# Altium PCB D5035_01.PcbDoc
Units mm, origin at the board's own origin, x right, y up, seen from the top; angles counter-clockwise.
Board outline 73 x 39 mm, 2 copper layers (Top Layer, Bottom Layer), stack 1.57 mm thick; 74 components, 60 nets, 282 pads, 39 vias.
Unrouted connection lines stored in the file: 1.
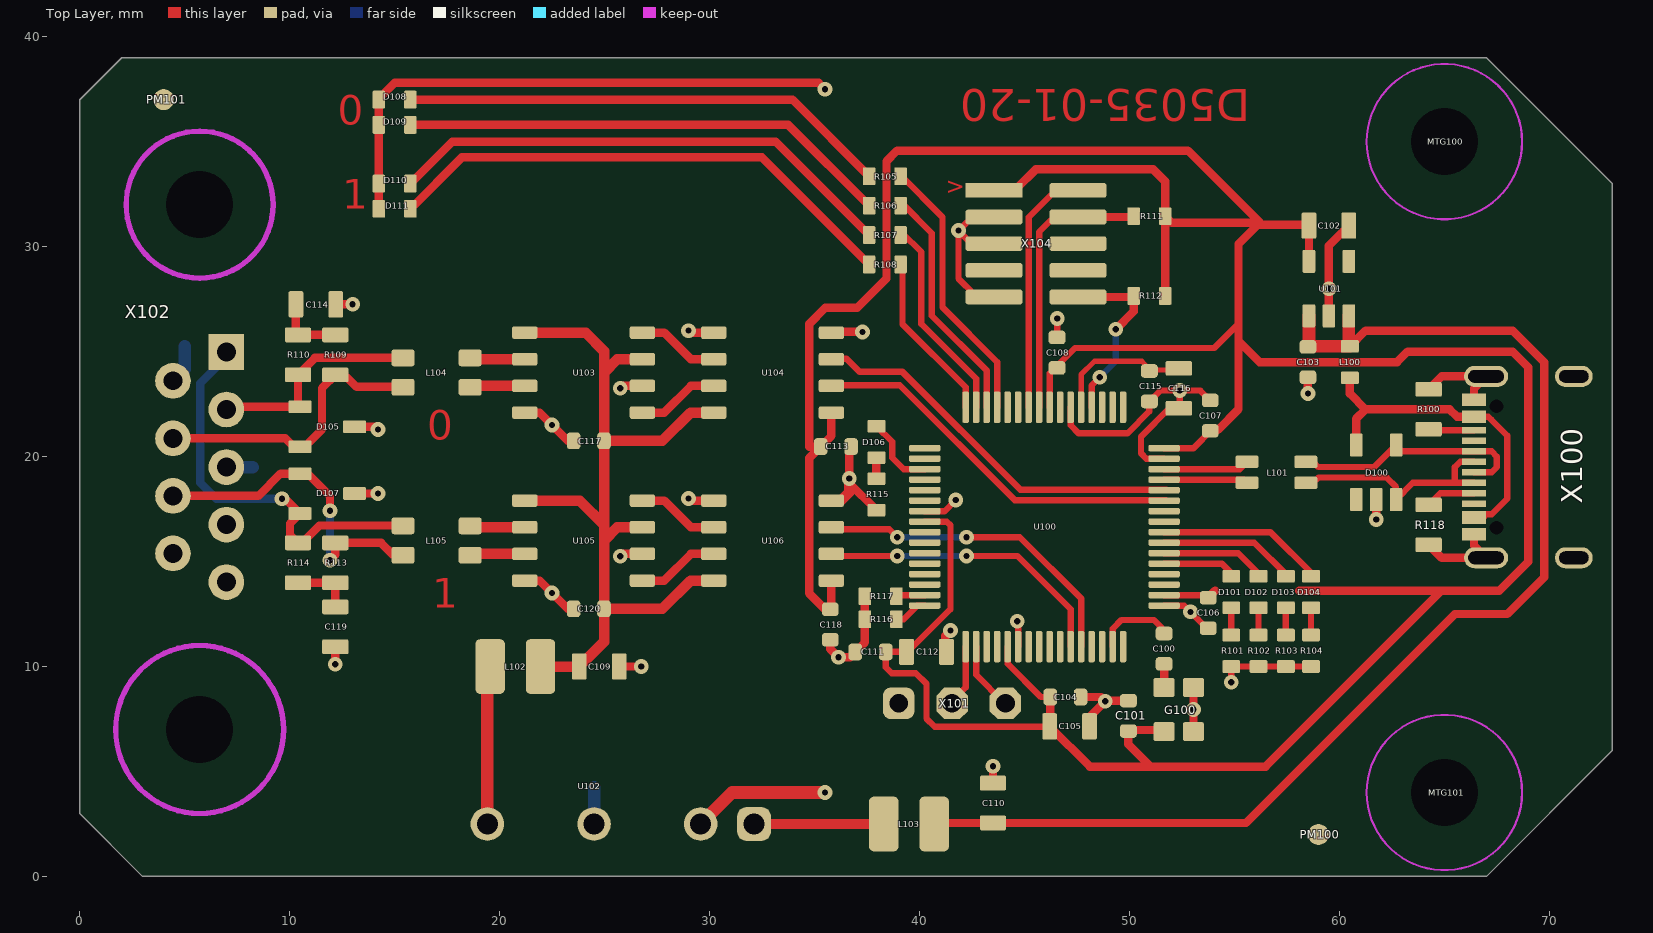
[diagram p0: Top Layer view]
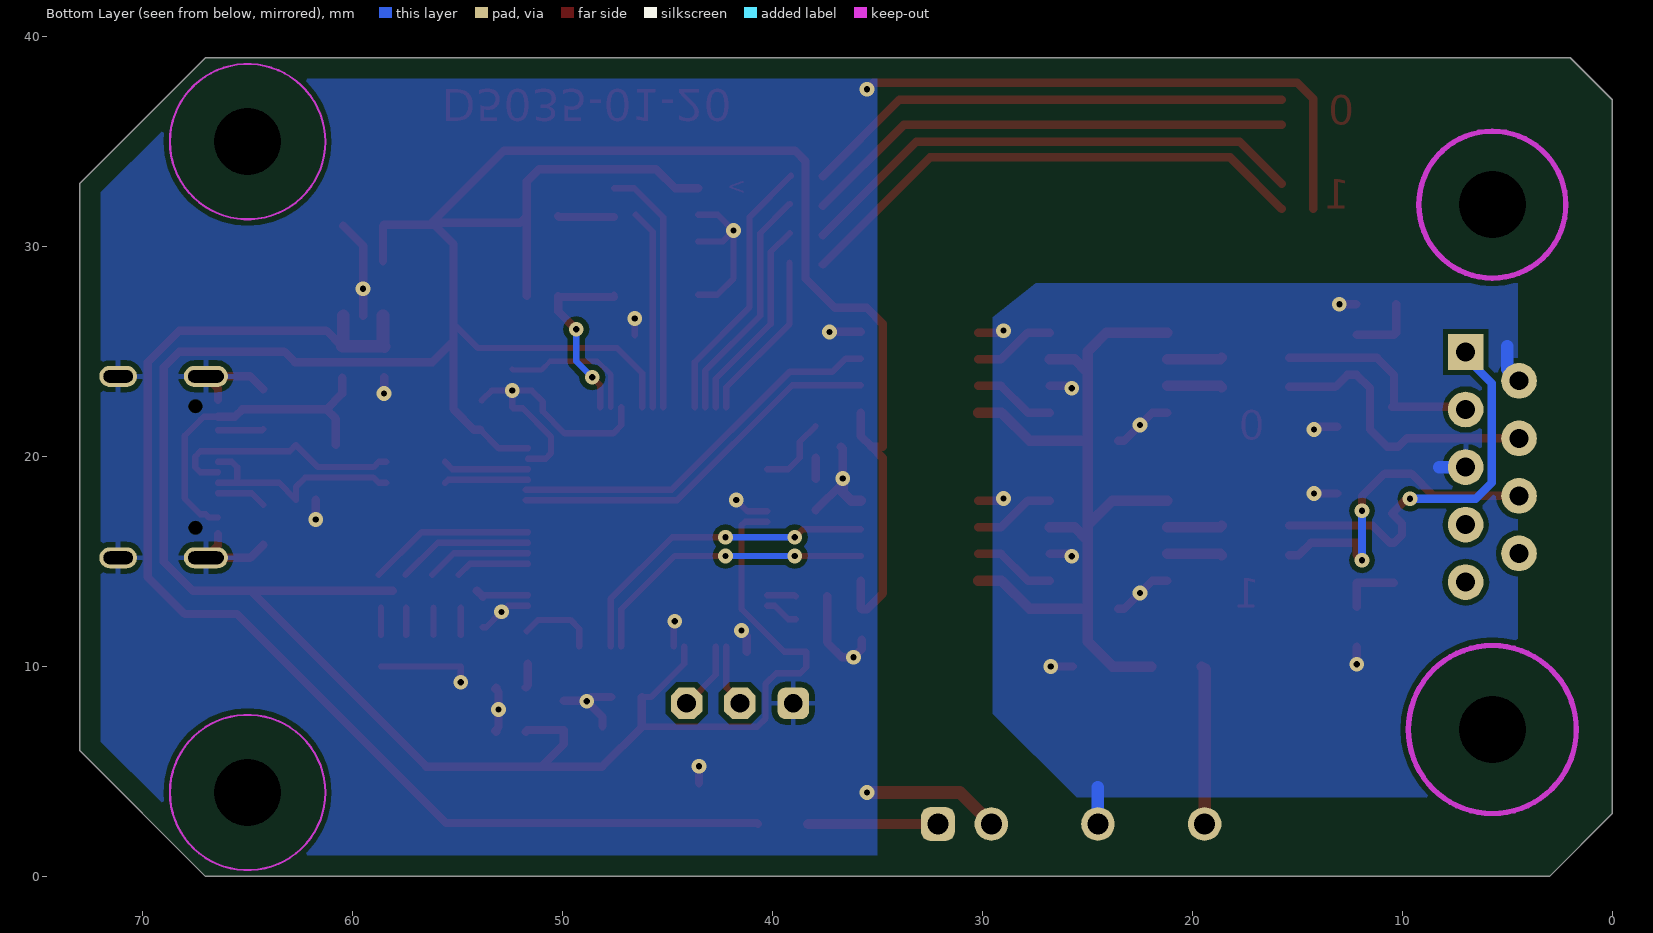
[diagram p1: Bottom Layer view, seen from below]

## Layer stack, top to bottom
Top Solder: solder mask 0.01, Solder Resist, Dk 3.5
Top Layer: signal copper 0.035
Dielectric 1: dielectric 1.5, FR-4, Dk 4.8
Bottom Layer: signal copper 0.035
Bottom Solder: solder mask 0.01, Solder Resist, Dk 3.5

## Board outline
0,3 0,37 2,39 67,39 73,33 73,6 67,0 3,0

## Design rules (kind name [scope] priority, off if disabled: settings)
BoardOutlineClearance [All] p1: gap=1 ignorepadtopadclearanceinfootprint=FALSE
Clearance [All] p1: gap=0.152 ignorepadtopadclearanceinfootprint=FALSE except(0: Arc-Hole Track-Hole SMDPad-Hole THPad-Hole Via-Hole Fill-Hole Poly-Hole Region-Hole Text-Hole; 0.254: Arc-Poly Track-Poly SMDPad-Poly THPad-Poly Via-Poly Fill-Poly Poly-Poly) // 1
DiffPairsRouting [All] p1: maxlimit=0.254 minlimit=0.2 mostfreqgap=0.254 toplayer_minwidth=0.25 toplayer_maxwidth=0.381 toplayer_prefwidth=0.3 bottomlayer_minwidth=0.25 bottomlayer_maxwidth=0.381 bottomlayer_prefwidth=0.3 maxuncoupledlength=12.7
HoleSize [All] p1: absolutevalues=TRUE maxlimit=5.08 minlimit=0.3 maxpercent=80.000 minpercent=20.000
MinimumSolderMaskSliver [All] p1: minsoldermaskwidth=0.11
PasteMaskExpansion [All] p1 off: expansion=0
PolygonConnect PolygonConnect_2 [IsVia] p1: connectstyle=Direct reliefconductorwidth=0.254 reliefentries=4 polygonreliefangle="90 Angle" airgapwidth=0.254
PolygonConnect PolygonConnect_1 [IsPad] p2: thpad.connectstyle=Relief thpad.reliefconductorwidth=0.254 thpad.reliefentries=4 thpad.polygonreliefangle="90 Angle" thpad.airgapwidth=0.254 smdpad.connectstyle=Direct smdpad.reliefconductorwidth=0.254 smdpad.reliefentries=4 smdpad.polygonreliefangle="90 Angle" smdpad.airgapwidth=0.254 via.connectstyle=Direct via.reliefconductorwidth=0.254 via.reliefentries=4 via.polygonreliefangle="90 Angle" via.airgapwidth=0.254
PolygonConnect [All] p3: connectstyle=Relief reliefconductorwidth=0.406 reliefentries=4 polygonreliefangle="90 Angle" airgapwidth=0.254
RoutingVias [All] p1: holewidth=0.3 width=0.6 viastyle="Through Hole" minholewidth=0.3 minwidth=0.6 maxholewidth=1 maxwidth=2
SilkToBoardRegionClearance [All] p1 off:
SilkToSilkClearance [All] p1 off: silktosilkclearance=0.254
SilkToSolderMaskClearance [IsPad] p1 off: minsilkscreentomaskgap=0.254 clearancetoexposedcopper=TRUE
SolderMaskExpansion SolderMaskExpansion_VIA [IsVia] p1: expansion=0.05 istentingtop=FALSE soldermaskfromhole=TRUE
SolderMaskExpansion [All] p2: expansion=0.04 istentingtop=FALSE
Width [All] p1: maxlimit=2.54 minlimit=0.25 preferedwidth=0.3 minimp=50.000000 maximp=50.000000 favimp=50.000000
23 further rules are at their usual default settings.

## Components (designator, comment, footprint, x,y, rotation, side; value= is the part's Value field where it differs from the comment)
C100 "10n" CAPC1608X09L 51.65,10.85 r270 top
C101 "100n" CAPC1608X09L 49.95,7.65 r270 top
C102 "4µ7" CAPC2012X14L 59.5,31 r180 top
C103 "100n" CAPC1608X09L 58.5,24.5 r90 top
C104 "100n" CAPC1608X09L 46.95,8.55 r180 top
C105 "4µ7" CAPC2012X14L 47.15,7.15 r180 top
C106 "100n" CAPC1608X09L 53.75,12.55 r90 top
C107 "100n" CAPC1608X09L 53.85,21.95 r270 top
C108 "100n" CAPC1608X09L 46.55,24.95 r270 top
C109 "4µ7" CAPC2012X14L 24.75,10 r180 top
C110 "4µ7" CAPC2012X14L 43.5,3.5 r270 top
C111 "100n" CAPC1608X09L 37.668,10.697 r0 top
C112 "4µ7" CAPC2012X14L 40.335,10.697 r180 top
C113 "100n" CAPC1608X09L 36.017,20.476 r180 top
C114 "4n7" CAPC2012X14L 11.25,27.25 r180 top
C115 "100n" CAPC1608X09L 50.95,23.35 r90 top
C116 "4µ7" CAPC2012X14L 52.35,23.25 r90 top
C117 "100n" CAPC1608X09L 24.25,20.75 r0 top
C118 "100n" CAPC1608X09L 35.75,12 r90 top
C119 "4n7" CAPC2012X14L 12.176,11.89 r90 top
C120 "100n" CAPC1608X09L 24.25,12.75 r0 top
D100 "WE_824011" SOT95P280X110-5N 61.75,19.25 r90 top
D101 "red" DIOC1608X06N_LED 54.85,13.55 r90 top
D102 "yellow" DIOC1608X06N_LED 56.15,13.55 r90 top
D103 "green" DIOC1608X06N_LED 57.45,13.55 r90 top
D104 "blue" DIOC1608X06N_LED 58.65,13.55 r90 top
D105 "PESD1CAN" SOT95P280X110-3N 11.795,21.415 r0 top
D106 "green" DIOC1608X06N_LED 37.95,20.7 r90 top
D107 "PESD1CAN" SOT95P280X110-3N 11.795,18.24 r0 top
D108 "green" DIOC1608X06N_LED 15,37 r0 top
D109 "red" DIOC1608X06N_LED 15,35.8 r0 top
D110 "green" DIOC1608X06N_LED 15,33 r0 top
D111 "red" DIOC1608X06N_LED 15,31.8 r0 top
G100 "16MHz" TG2520 52.35,7.95 r90 top
L100 "WE_742792641" INDC1608X06L 60.5,24.5 r90 top
L101 "WE_744232090" WE_744232090 57,19.25 r180 top
L102 "82103C" Murata_8200C 20.75,10 r0 top
L103 "82103C" Murata_8200C 39.5,2.5 r180 top
L104 "DLW32SH101XF2L‎" ACT1210 17,24 r0 top
L105 "DLW32SH101XF2L‎" ACT1210 17,16 r0 top
MTG100 "MH_M3" HOLE_3_2MM 65,35 r0 top
MTG101 "MH_M3" HOLE_3_2MM 65,4 r0 top
PM100 "Fidicual" PM100 59,2 r0 top
PM101 "Fidicual" PM100 4,37 r0 top
R100 "4k7" RESC2012X06L 64.25,22.25 r270 top
R101 "1k" RESC1608X06L 54.85,10.75 r90 top
R102 "1k" RESC1608X06L 56.15,10.75 r90 top
R103 "1k" RESC1608X06L 57.45,10.75 r90 top
R104 "1k" RESC1608X06L 58.65,10.75 r90 top
R105 "2k" RESC1608X06L 38.35,33.35 r0 top
R106 "1k" RESC1608X06L 38.35,31.95 r0 top
R107 "2k" RESC1608X06L 38.35,30.55 r0 top
R108 "1k" RESC1608X06L 38.35,29.15 r0 top
R109 "4k7" RESC2012X06L 12.176,24.844 r270 top
R110 "4k7" RESC2012X06L 10.398,24.844 r270 top
R111 "10k" RESC1608X06L 50.95,31.45 r0 top
R112 "10k" RESC1608X06L 50.95,27.65 r0 top
R113 "4k7" RESC2012X06L 12.176,14.938 r90 top
R114 "4k7" RESC2012X06L 10.398,14.938 r90 top
R115 "10k" RESC1608X06L 37.95,18.2 r90 top
R116 "10k" RESC1608X06L 38.15,12.25 r180 top
R117 "10k" RESC1608X06L 38.15,13.35 r180 top
R118 "4k7" RESC2012X06L 64.25,16.75 r90 top
U100 "SAME51J18A-AU / SAME51J19A-AU" TSQFP50P1200X1200X120-64N 45.95,16.65 r0 top
U101 "MIC5317-3.3YD5" SOT95P280X110-5N 59.5,28 r90 top
U102 "MER1S0505SC" MER1SxxxxC 24.5,2.5 r180 top
U103 "TCAN1462VDRQ1" SOIC127P600X175-8N 24,24 r180 top
U104 "SI8621EC-B-IS" SOIC127P600X175-8N 33,24 r180 top
U105 "TCAN1462VDRQ1" SOIC127P600X175-8N 24,16 r180 top
U106 "SI8621EC-B-IS" SOIC127P600X175-8N 33,16 r180 top
X100 "USB-C_16p" USBC_16P 70,19.5 r90 top
X101 "1x3 2,54mm" PINH_1x03_2_54mm 41.55,8.25 r0 top
X102 "9651226803" 09651226803 6.985,19.5 r90 top
X104 "SWD" FTSH-105-01-L-DV-K 45.55,30.15 r270 top

## Footprints (in the part's own frame and the unit in brackets; to place one, negate y for a bottom-side part, rotate by r counter-clockwise, add the part's x,y. Pads: shape width x height; smd on the part's side, far side on the other; paste and mask are expansions set on the pad)
09651226803 [mm]
  rect 1.7x1.7 hole 0.9: 1(5.48,0)
  round 1.7 hole 0.9: 2(2.74,0) 3(0,0) 4(-2.74,0) 5(-5.48,0) 6(4.11,2.54) 7(1.37,2.54) 8(-1.37,2.54) 9(-4.11,2.54)
  round 0 hole 3.2 unplated: SH(-12.5,1.27) SH(12.5,1.27)
  body extent -15.46,-1.85 15.45,19.05, height 13.55
ACT1210 [mm]
  rrect30% 1.1x0.8 smd: 1(-1.6,0.7) 2(-1.6,-0.7) 3(1.6,-0.7) 4(1.6,0.7)
  body extent -1.6,-1.3 1.6,1.3, height 2.5
CAPC1608X09L [mm] "Chip Capacitor, 2-Leads, Body 1,6x0,8mm, IPC High Density"
  rrect50% 0.65x0.8 smd: 1(-0.725,0) 2(0.725,0)
  body extent -0.8,-0.4 0.8,0.4, height 0.6
CAPC2012X14L [mm] "Chip Capacitor, 2-Leads, Body 2,0x1,3mm, IPC High Density"
  rrect20% 0.7x1.25 smd: 1(-0.95,0) 2(0.95,0)
  body extent -1,-0.62 1,0.62, height 0.6
DIOC1608X06N_LED [mm]
  rrect20% 0.6x0.85 smd: 1(-0.75,0) 2(0.75,0)
  body extent -0.8,-0.4 0.8,0.4, height 0.7
FTSH-105-01-L-DV-K [mm] "SAMTEC FTSH 5pin doppelreihig, 1,27mm x 1,27mm"
  rect 0.7x2.7 smd: 1(-2.53,-2)
  rrect30% 0.7x2.7 smd: 2(-2.53,2) 3(-1.26,-2) 4(-1.26,2) 5(0.01,-2) 6(0.01,2) 7(1.28,-2) 8(1.28,2) 9(2.55,-2) 10(2.55,2)
  body extent -3.17,-2.92 3.18,2.92, height 6.11
HOLE_3_2MM [mm] "Mouting-Hole for screws M3 with keepout for washer"
  round 0 hole 3.2 unplated: 1(0,0)
  Keep-Out Layer circle w0.1: c0,0 r3.7
INDC1608X06L [mm] "Ferrite Bead 2-Leads, Body 1,6x0,8mm, IPC High Density"
  rrect20% 0.6x0.85 smd: 1(-0.75,0) 2(0.75,0)
  body extent -0.8,-0.4 0.8,0.4, height 0.8
MER1SxxxxC [mm]
  rrect50% 1.6x1.6 hole 1: 1(-7.62,0)
  round 1.6 hole 1: 2(-5.08,0) 4(0,0) 6(5.08,0)
  body extent -9.5,-4.77 10,1.25, height 10.1
Murata_8200C [mm]
  rrect30% 1.4x2.6 smd paste+0 mask+0.102: 1(-1.2,0)
  rrect30% 1.4x2.6 smd: 2(1.2,0)
  body extent -1.55,-1.26 1.65,1.24, height 2
PINH_1x03_2_54mm [mm] "Pin-Header 3 polig"
  rrect50% 1.5x1.5 hole 0.9: 1(-2.54,0)
  oct 1.5x1.5 hole 0.9: 2(0,0) 3(2.54,0)
  body extent -3.94,-1.27 3.81,1.27, height 8.38
PM100 [mm] "Passermarke für Bestueckungsautomaten rund"
  round 1 smd: 1(0,0)
  Top Layer pour cut-out: -1.2,1.2 1.2,1.2 1.2,-1.2 -1.2,-1.2
RESC1608X06L [mm] "Chip Resistor, 2-Leads, Body 1,6x0,8mm, IPC High Density"
  rrect20% 0.6x0.85 smd: 1(-0.75,0) 2(0.75,0)
  body extent -0.8,-0.4 0.8,0.4, height 0.4
RESC2012X06L [mm] "Chip Resistor, 2-Leads, Body 2,0x1,3mm, IPC High Density"
  rrect20% 0.7x1.25 smd: 1(-0.95,0) 2(0.95,0)
  body extent -1,-0.63 1,0.63, height 0.5
SOIC127P600X175-8N [mm] "SOIC, 8-Leads, Body 5,0x4,0mm (max), Pitch 1,27mm, IPC Medium Density"
  rrect30% 1.2x0.6 smd: 1(-2.8,1.905) 2(-2.8,0.635) 3(-2.8,-0.635) 4(-2.8,-1.905) 5(2.8,-1.905) 6(2.8,-0.635) 7(2.8,0.635) 8(2.8,1.905)
  body extent -3,-2.45 3,2.45, height 1.7
SOT95P280X110-3N [mm] "SOT23, 3-Leads, Body 3,0x3,0mm (max), Pitch 0,95mm, IPC Medium Density"
  rrect20% 1.1x0.6 smd: 1(-1.3,0.95) 2(-1.3,-0.95) 3(1.3,0)
  body extent -1.4,-1.45 1.4,1.45, height 1.3
SOT95P280X110-5N [mm] "SOT23, 5-Leads, Body 3,0x3,0mm (max), Pitch 0,95mm, IPC Medium Density"
  rrect20% 1.1x0.6 smd: 1(-1.3,0.95) 2(-1.3,0) 3(-1.3,-0.95) 4(1.3,-0.95) 5(1.3,0.95)
  body extent -1.4,-1.45 1.4,1.45, height 1.45
TG2520 [mm]
  rrect20% 0.9x1 smd: 1(-1.05,-0.7) 2(1.05,-0.7) 3(1.05,0.7) 4(-1.05,0.7)
  body extent -1.3,-1.06 1.3,1.04, height 0.8
TSQFP50P1200X1200X120-64N [mm] "TSQFP, 64-Leads, Body 10,00x10,00mm, Pitch 0,50mm, IPC Medium Density"
  rrect50% 1.5x0.3 smd: 1(-5.7,3.75) 2(-5.7,3.25) 3(-5.7,2.75) 4(-5.7,2.25) 5(-5.7,1.75) 6(-5.7,1.25) 7(-5.7,0.75) 8(-5.7,0.25) 9(-5.7,-0.25) 10(-5.7,-0.75) 11(-5.7,-1.25) 12(-5.7,-1.75) 13(-5.7,-2.25) 14(-5.7,-2.75) 15(-5.7,-3.25) 16(-5.7,-3.75) 33(5.7,-3.75) 34(5.7,-3.25) 35(5.7,-2.75) 36(5.7,-2.25) 37(5.7,-1.75) 38(5.7,-1.25) 39(5.7,-0.75) 40(5.7,-0.25) 41(5.7,0.25) 42(5.7,0.75) 43(5.7,1.25) 44(5.7,1.75) 45(5.7,2.25) 46(5.7,2.75) 47(5.7,3.25) 48(5.7,3.75)
  rrect50% 0.3x1.5 smd: 17(-3.75,-5.7) 18(-3.25,-5.7) 19(-2.75,-5.7) 20(-2.25,-5.7) 21(-1.75,-5.7) 22(-1.25,-5.7) 23(-0.75,-5.7) 24(-0.25,-5.7) 25(0.25,-5.7) 26(0.75,-5.7) 27(1.25,-5.7) 28(1.75,-5.7) 29(2.25,-5.7) 30(2.75,-5.7) 31(3.25,-5.7) 32(3.75,-5.7) 49(3.75,5.7) 50(3.25,5.7) 51(2.75,5.7) 52(2.25,5.7) 53(1.75,5.7) 54(1.25,5.7) 55(0.75,5.7) 56(0.25,5.7) 57(-0.25,5.7) 58(-0.75,5.7) 59(-1.25,5.7) 60(-1.75,5.7) 61(-2.25,5.7) 62(-2.75,5.7) 63(-3.25,5.7) 64(-3.75,5.7)
  body extent -6,-6 6,6, height 1.2
USBC_16P [mm]
  round 0 hole 0.65 unplated: 1(-2.89,2.515) 1(2.89,2.515)
  rect 0.6x1.15 smd paste+0 mask+0: A1-B12(-3.2,3.59) A4-B9(-2.4,3.59) B1-A12(3.2,3.59) B4-A9(2.4,3.59)
  rect 0.3x1.15 smd paste+0 mask+0: A5(-1.25,3.59) A6(-0.25,3.59) A7(0.25,3.59) A8(1.25,3.59) B5(1.75,3.59) B6(0.75,3.59) B7(-0.75,3.59) B8(-1.75,3.59)
  rrect100% 1x1.8 hole 1.4 slot 0.6 at 0 deg paste-2539.97 mask+0: SHIELD(-4.32,-1.165) SHIELD(4.32,-1.165)
  rrect100% 1x2.1 hole 1.7 slot 0.6 at 0 deg paste-2539.97 mask+0: SHIELD(-4.32,3.015) SHIELD(4.32,3.015)
  body extent -4.79,-3.76 4.79,3.77, height 3.26
WE_744232090 [mm] "SMD Stromkomp. Datenleitungsfilter WE-CNSW"
  rrect30% 1.1x0.6 smd: 1(-1.4,0.5) 2(1.4,0.5) 3(1.4,-0.5) 4(-1.4,-0.5)
  body extent -1.7,-0.9 1.7,0.89, height 1.8

## Part data
C100 C101 C103 C104 C106 C107 C108 C111 C113 C115 C117 C118 C120: library part CAPC_0603, "0603 Chip Capacitor", Bauteilart=Capacitor, Editor=rriedel, Kategorie=generic, PackageDescription=0603, Part Number=CAPC_0603, Status=tested, Unterart=unpolarized
C102 C105 C109 C110 C112 C114 C116 C119: library part CAPC_0805, "0805 Chip Capacitor", Bauteilart=Capacitor, Editor=rriedel, Kategorie=generic, PackageDescription=0805, Part Number=CAPC_0805, Status=tested, Unterart=unpolarized
D100: "TVS Diode Array WE-TVS", Manufacturer=Wuerth, Bauteilart=Diode, Date=22.06.2020, Distributor_1=Digi-Key, Distributor_1_Part_Number=732-4465-1-ND, Editor=rriedel, Kategorie=Part, PackageDescription=SOT23-5, Part Number=WE_824011, Part_Number_1=824011, Status=new, Unterart=ESD
D101 D102 D103 D104 D106 D108 D109 D110 D111: library part LED_0603, "LED, 0603", Bauteilart=Diode, Date=29.06.2020, Editor=rriedel, Kategorie=generic, PackageDescription=0603, Part Number=LED_0603, Status=new, Unterart=generic
D105 D107: "CAN bus ESD protection diode", Manufacturer=Nexperia, Bauteilart=Diode, Date=27.06.2020, Distributor_1=Digi-Key, Distributor_1_Part_Number=1727-3817-1-ND, Editor=rriedel, Kategorie=Part, PackageDescription=SOT23, Part Number=PESD1CAN, Part_Number_1=PESD1CAN, Status=new, Unterart=Transil
G100: library part TG2520SMN16.0000M-MCGNNM, "16MHz Oscillator, +/- 0.5ppm", Manufacturer=Epson, Bauteilart=Oscillator, Date=20.11.2021, Distributor_1=Mouser, Distributor_1_Part_Number=732-TG252S16MCGNNM3, Editor=rriedel, Kategorie=Part, PackageDescription="2,5mm x 2,0mm", Part Number=TG2520SMN16.0000M-MCGNNM, Part_Number_1=TG2520SMN16.0000M-MCGNNM, Status=new, Unterart=TG2520
L100: "SMT EMI suppression ferrite bead WE-CBF", Manufacturer=Wuerth, Bauteilart=Inductor, Date=22.06.2020, Distributor_1=Digi-Key, Distributor_1_Part_Number=732-1592-1-ND, Editor=rriedel, Kategorie=Part, PackageDescription=0603, Part Number=WE_742792641, Part_Number_1=742792641, Status=new, Unterart="Ferrite Bead"
L101: "SMD common mode noise suppressor WE-CNSW", Manufacturer=Wuerth, Bauteilart=Inductor, Date=22.06.2020, Distributor_1=Digi-Key, Distributor_1_Part_Number=732-1469-1-ND, Editor=rriedel, Kategorie=Part, PackageDescription=3216, Part Number=WE_744232090, Part_Number_1=744232090, Status=new, Unterart=Filter
L102 L103: "10µH, 0,5A, 400mR", Manufacturer=Murata, Bauteilart=Inductor, Date=27.06.2020, Distributor_1=Digi-Key, Distributor_1_Part_Number=811-2473-1-ND, Editor=rriedel, Kategorie=Part, PackageDescription="3,2x2,5 mm", Part Number=82103C, Part_Number_1=82103C, Status=new, Unterart=Power
L104 L105: library part ACT1210-101-2P-TL00, "Common Mode Filter,  -50°C ... +150°C, AEC-Q200", Manufacturer=TDK, Bauteilart=Inductor, Date=17.10.2017, Distributor_1=Farnell, Distributor_1_Part_Number=2442838, Distributor_2=Digi-Key, Distributor_2_Part_Number=445-172386-1-ND, Editor=rriedel, Kategorie=Part, PackageDescription=3225, Part Number=ACT1210-101-2P-TL00, Part_Number_1=ACT1210-101-2P-TL00, Status=tested, Unterart=Filter
MTG100 MTG101: "Mounting-Hole for M3 screws", Bauteilart=Mechanic, Date=13.05.2018, Editor=rriedel, Kategorie=No_Bom, Part Number=MH_M3, Status=tested, Unterart=Holes
PM100 PM101: library part PM100, "Passermarke für Bestueckungsautomaten 1mm rund, 2,2mm quadratischer Ausschnitt, 2,1 mm Ausstellung Loetstoplack", Bauteilart=Manufacturing, Date=22.02.2017, Editor=rriedel, Kategorie=No_Bom, PackageDescription="Passermarke 1.0mm rund", Part Number=PM100, Status=tested, Unterart=Passermarke
R100 R109 R110 R113 R114 R118: library part RESC_0805, "0805 Chip Resistor", Bauteilart=Resistor, Editor=rriedel, Kategorie=generic, PackageDescription=0805, Part Number=RESC_0805, Status=tested, Unterart=generic
R101 R102 R103 R104 R105 R106 R107 R108 R111 R112 R115 R116 R117: library part RESC_0603, "0603 Chip Resistor", Bauteilart=Resistor, Editor=rriedel, Kategorie=generic, PackageDescription=0603, Part Number=RESC_0603, Status=tested, Unterart=generic
U100: library part SAME51J19A-AU, "32-bit Microcontroller, 120MHz Cortex M4-F, 512k FLASH,  2x CAN-FD, -40…85°C", Manufacturer=Microchip, Bauteilart=MikroController, Date=15.07.2018, Distributor_1=Digi-Key, Distributor_1_Part_Number=ATSAME51J19A-AUTCT-ND, Editor=rriedel, Kategorie=Part, PackageDescription=TQFP64-0.5mm, Part Number=SAME51J19A-AU, Part_Number_1=SAME51J19A-AU, Status=tested, Unterart="32bit Microchip"
U101: library part MIC5233-3.3, "100 mA LDO,  Vout= 3,3V, -40°C..125°C", Manufacturer=Microchip, Bauteilart=IC, ComponenLinkDescription=Datasheet, ComponenLinkURL="D:\Altium_lib_HW-Labor_GF\Altium_lib\Datenblaetter\pcb\Integrierte Schaltkreise\Microchip\mic5233.pdf", Date=15.09.2016, Distributor_1=Farnell, Distributor_1_Part_Number=2510274, Editor=rriedel, Kategorie=Part, PackageDescription=SOT23-5, Part Number=MIC5233-3.3, Part_Number_1=MIC5233-3.3YM5, Status=tested, Unterart=Linear-Regulators
U102: "Isolated 1W Single Output DC-DC Converters 5V/5V 200mA", Manufacturer=Murata, Bauteilart=Module, Date=27.06.2020, Distributor_1=Digi-Key, Distributor_1_Part_Number=811-2124-5-ND‎, Editor=rriedel, Kategorie=Part, PackageDescription="4Pin SIP", Part Number=MER1S0505SC, Part_Number_1=MER1S0505SC, Status=new, Unterart=DCDC
U103 U105: "CAN-FD SIC transceiver 8MBit, VIO Pin", Manufacturer=TI, Bauteilart=IC, Date=03.01.2024, Distributor_1=Mouser, Distributor_1_Part_Number=595-TCAN1462VDRQ1, Editor=rriedel, Kategorie=Part, PackageDescription=SO8, Part Number=TCAN1462VDRQ1, Part_Number_1=TCAN1462VDRQ1, Status=new, Unterart=CAN
U104 U106: "Dual channel digital isolator, 150Mbit, 3,75kV", Manufacturer="Silicon Labs", Bauteilart=IC, Date=29.06.2020, Distributor_1=Digi-Key, Distributor_1_Part_Number=336-4776-1-ND, Editor=rriedel, Kategorie=Part, PackageDescription=SO8, Part Number=SI8621EC-B-IS, Part_Number_1=SI8621EC-B-IS, Status=new, Unterart=Isolator
X100: "SMD USB-C 16p", Categorie=Part, Date=19.07.2025, Distributor_1=JLCBCP, Distributor_1_Part_Number=C2765186, Editor=rriedel, Group=Connector, PackageDescription=USB-C_16p, Part Number=USB-C_16p, Status=tested, Type=USB
X101: library part PINH_1x3_2_54, "Pin-Header 2,54 mm 3pins", Bauteilart=Connector, Date=02.02.2017, Editor=rriedel, Kategorie=generic, Part Number=PINH_1x3_2_54, Status=tested, Unterart=Pin-Header
X102: library part 09651226803, "D-Sub, 9 pin, male, right angle", Manufacturer=Harting, Bauteilart=Connector, Date=29.06.2020, Distributor_1=Farnell, Distributor_1_Part_Number=2752007, Editor=rriedel, Kategorie=Part, PackageDescription=D-Sub, Part Number=09651226803, Part_Number_1=09651226803, Status=tested, Unterart=D-Sub
X104: "ARM Debug-Header 2x5 1,27 mm", Bauteilart=Connector, Date=12.08.2018, Editor=rriedel, Kategorie=Part, PackageDescription="2x5 1,27mm", Part Number=SWD, Status=tested, Unterart=Debug

## Via types
v1: diameter 0.7, hole 0.3, Top Layer to Bottom Layer, tented both sides, 39 vias

## Nets (pads, with @x,y where several pads share a name; then routed paths per layer and width w, separated by ;. In a path a pad name is that pad's centre, name@x,y a point inside that pad or via, vN(x,y) a via of type N, cw(c..) or ccw(c..) an arc to the next point about the centre after c; other vN are vias at no path point)
3V3: C101.2 C102.2 C104.2 C105.2 C106.2 C107.2 C108.2 C111.2 C112.2 C113.2 C118.2 G100.4 R111.2 R112.2 U100.8 U100.21 U100.34 U100.48 U100.56 U101.5 U104.1 U106.1 X104.1 | length 185.7
  Top Layer w0.3: U100.8 41.3,16.9 41.478,16.722 41.478,12.729 41.467,12.729 39.435,10.697 C112.2 C111.2 38.393,9.972 38.684,9.681 39.827,9.681 40.335,9.173 40.335,7.522 40.727,7.13 C105.2@46.2,7.13 ; U100.21 44.2,10.134 45.784,8.55 C104.2 ; U100.56 46.2,23.965 47.41,25.175 54.051,25.175 55.194,26.318 ; U100.34 53.724,13.4 C106.2@53.797,13.327 ; U100.48 53.049,20.4 C107.2@53.924,21.275
  Top Layer w0.4: U106.1 35.8,12.775 C118.2 35.513,12.725 34.75,13.488 34.75,19.934 C113.2 ; U104.1 35.8,20.984 C113.2 ; X104.1@43.542,32.785 44.643,32.785 45.542,33.684 51.13,33.684 51.7,33.114 R111.2 ; C104.2 46.225,7.175 C105.2 48.114,5.236 51.003,5.236 ; R112.2 R111.2 ; G100.4@51.75,6.9 51.675,6.975 49.95,6.975 C101.2 49.95,6.289 51.003,5.236 ; C106.2@53.797,13.327 54.088,13.618 ; C107.2@53.924,21.275 54.215,21.275 55.194,22.254 55.194,25.5 ; 58.088,13.618 64.868,13.618 ; U101.5 C102.2 58.5,31.05 56.116,31.05 ; C113.2 34.75,20.476 34.75,26.321 35.509,27.08 37.033,27.08 38.43,28.477 38.43,34.065 38.938,34.573 52.781,34.573 56.21,31.144 ; 51.003,5.236 56.486,5.236 64.868,13.618 ; R111.2 52.006,31.144 56.21,31.144 ; 55.194,25.5 55.194,26.318 55.194,30.128 56.116,31.05 ; 55.194,25.5 56.194,24.5 62.75,24.5 63.25,25 68.25,25 69,24.25 69,15 67.618,13.618 64.868,13.618 ; 56.116,31.05 56.21,31.144
5V: C103.2 C110.2 L100.2 L103.1 U101.1 U101.3 | length 59.3
  Top Layer w0.4: L103.1 40.75,2.55 C110.2 55.55,2.55 65.5,12.5 68,12.5 69.75,14.25 69.75,24.5 68.25,26 61.25,26 L100.2
  Top Layer w0.6: C103.2 C103.2@58.525,25.25 ; U101.1 58.55,25.275 C103.2@58.525,25.25 ; U101.3 60.45,25.3 L100.2 C103.2@58.525,25.25
5V_CAN: C109.2 C117.2 C120.2 L102.2 U103.3 U103.5 U104.8 U105.3 U105.5 U106.8 | length 41.5
  Top Layer w0.5: U105.5 23.82,17.905 24.975,16.75 ; U103.5 24.095,25.905 24.975,25.025 24.975,24 ; L102.2 C109.2 24.975,11.175 C120.2 ; U105.3 25.61,16.635 24.975,16 ; U103.3 25.61,24.635 24.975,24 ; U106.8 29.095,14.095 27.75,12.75 C120.2 ; U104.8 29.095,22.095 27.75,20.75 C117.2 ; C120.2 24.975,16 ; 24.975,16 24.975,16.75 ; 24.975,16.75 C117.2 ; C117.2 24.975,24
CAN_RX_1: U100.44 U104.3 | length 18.5
  Top Layer w0.305: U104.3@35.8,24.667 36.525,24.667 37.16,24.032 39.192,24.032 44.808,18.416 U100.44@51.75,18.416
CAN_RX_2: U100.28 U106.3 | length 15.6
  Top Layer w0.3: U106.3@35.8,16.539 38.557,16.539 v1(38.938,16.158) ; v1(42.24,16.158) 44.78,16.158 47.7,13.238 U100.28
  Bottom Layer w0.3: v1(38.938,16.158) v1(42.24,16.158)
CAN_TX_1: U100.43 U104.2 | length 18.2
  Top Layer w0.305: U104.2@35.8,23.397 39.065,23.397 44.546,17.916 U100.43@51.75,17.916
CAN_TX_2: U100.27 U106.2 | length 14.2
  Top Layer w0.3: U106.2@35.8,15.269 v1(38.938,15.269) ; v1(42.24,15.269) 44.653,15.269 47.2,12.722 U100.27
  Bottom Layer w0.3: v1(38.938,15.269) v1(42.24,15.269)
Debug_LED: D106.2 U100.3 | length 3.6
  Top Layer w0.3: D106.2 38.7,20.7 38.7,19.95 39.25,19.4 U100.3
GND: C101.1 C102.1 C103.1 C104.1 C105.1 C106.1 C107.1 C108.1 C110.1 C111.1 C112.1 C113.1 C115.1 C116.1 C118.1 D100.2 D108.1 D109.1 D110.1 D111.1 G100.1 G100.2 R100.1 R101.1 R102.1 R103.1 R104.1 R115.1 R116.2 R117.2 R118.1 U100.7 U100.22 U100.33 U100.47 U100.54 U101.2 U102.2 U104.4 U106.4 X100.A1-B12 X100.B1-A12 X100.SHIELD X101.1 X104.3 X104.5 X104.9 | length 101.2
  Top Layer w0.3: U100.7 41.196,17.4 v1(41.732,17.936) ; X104.9@43.542,27.705 42.631,27.705 41.859,28.477 v1(41.859,30.763) ; X104.5@43.542,30.245 42.377,30.245 v1(41.859,30.763) ; X104.3@43.542,31.515 42.611,31.515 v1(41.859,30.763) ; v1(44.65,12.15) 44.7,12.1 U100.22 ; C108.1@46.558,25.773 v1(46.558,26.572) ; U100.54 47.2,21.485 47.574,21.111 49.911,21.111 50.95,22.15 C115.1 51.468,23.143 v1(52.4,23.143) ; U100.33 52.61,12.9 v1(52.908,12.602) 53.633,11.877 C106.1@53.797,11.877 ; U100.47 50.8,19.9 50.55,20.15 50.55,20.95 51.9,22.3 C116.1 52.4,22.35 v1(52.4,23.143) ; C107.1 53.382,23.143 v1(52.4,23.143) ; v1(54.85,9.25) R101.1@54.85,9.984 ; R101.1 R102.1 R103.1 R104.1
  Top Layer w0.4: D111.1 D110.1 D109.1 D108.1 14.25,37.05 15,37.8 35.2,37.8 v1(35.5,37.5) ; C118.1 35.75,10.837 v1(36.144,10.443) 36.689,10.443 C111.1 37.4,11.154 R116.2 R117.2 ; U104.4@35.8,25.937 v1(37.287,25.937) ; C113.1 36.652,20.386 v1(36.652,18.952) 36.652,18.748 R115.1 ; C112.1@41.235,10.697 41.235,11.47 v1(41.478,11.713) ; C110.1 v1(43.5,5.25) ; C104.1 48.65,8.55 v1(48.85,8.35) ; C105.1 48.1,7.6 v1(48.85,8.35) ; C101.1 48.875,8.375 v1(48.85,8.35) ; G100.1@53.15,6.9 53.2,6.95 53.05,7.1 v1(53.05,7.95) 53.05,8.8 53.2,8.95 G100.2@53.15,9 ; v1(58.5,23) C103.1 ; U101.2 v1(59.5,28) 59.5,30.05 C102.1 ; v1(61.75,17) D100.2 ; R118.1 64.87,15.18 66.985,15.18 66.41,15.755 X100.A1-B12 ; R100.1 64.87,23.82 66.985,23.82 66.41,23.245 X100.B1-A12
  Top Layer w0.5: U106.4 36.246,17.905 36.652,18.311 v1@36.652,18.748
  Top Layer w0.6: U102.2 31.08,4 v1(35.5,4)
GND2: C109.1 C114.1 C117.1 C119.1 C120.1 D105.3 D107.3 U102.4 U103.2 U103.8 U104.5 U105.2 U105.8 U106.5 X102.3 X102.6 | length 20.3
  Top Layer w0.4: v1(12.176,10.112) C119.1 ; C114.1 v1(13,27.25) ; D107.3 v1(14.208,18.24) ; D105.3 14.081,21.415 v1(14.208,21.288) ; U105.8 21.905,14.095 v1(22.5,13.5) 23.25,12.75 C120.1 ; U103.8 21.905,22.095 v1(22.5,21.5) 23.25,20.75 C117.1 ; C109.1 v1(26.75,10) ; v1(25.75,15.25) 25.865,15.365 U105.2 ; v1(25.75,23.25) 25.865,23.365 U103.2 ; v1(29,18) 29.095,17.905 U106.5 ; v1(29,26) 29.095,25.905 U104.5
  Bottom Layer w0.6: X102.6 5,24.165 5,25.25 ; X102.3 8.25,19.5 ; U102.4 24.5,4.25
NetC100_1: C100.1 U100.31 | length 3.8
  Top Layer w0.3: U100.31 49.2,11.8 49.621,12.221 51.154,12.221 C100.1@51.7,11.675
NetC100_2: C100.2 G100.3 | length 1.2
  Top Layer w0.4: C100.2 51.65,9.1 G100.3@51.75,9
NetC114_2: C114.2 R109.1 R110.1 | length 3.3
  Top Layer w0.4: C114.2 10.3,25.892 R110.1 R109.1
NetC115_2: C115.2 C116.2 U100.53 | length 6.7
  Top Layer w0.25: U100.53 47.7,23.904 48.336,24.54 50.585,24.54 51.003,24.122 52.352,24.122 C116.2@52.4,24.17
NetC119_2: C119.2 R113.1 R114.1 | length 2.9
  Top Layer w0.4: R114.1 R113.1 C119.2
NetD100_3: D100.3 L101.1 X100.A7 X100.B7 | length 11
  Top Layer w0.3: L101.1 58.75,18.75 59,19 62.25,19 62.7,18.55 D100.3 63.5,18.75 65.455,18.75 ; X100.B7 65.455,18.75 ; X100.A7 65.75,19.75 65.5,19.5 65.5,18.795 65.455,18.75
NetD100_4: D100.4 L101.4 X100.A6 X100.B6 | length 11.6
  Top Layer w0.3: L101.4 58.75,19.75 59,19.5 61.65,19.5 D100.4 63,20.25 X100.B6 67.25,20.25 67.5,20 67.5,19.5 67.25,19.25 X100.A6
NetD101_1: D101.1 R101.2 | length 1.3
  Top Layer w0.3: R101.2 D101.1
NetD101_2: D101.2 U100.37 | length 3.5
  Top Layer w0.3: U100.37 54.408,14.9 D101.2@54.94,14.368
NetD102_1: D102.1 R102.2 | length 1.3
  Top Layer w0.3: R102.2 D102.1
NetD102_2: D102.2 U100.38 | length 5
  Top Layer w0.3: U100.38 55.178,15.4 D102.2@56.21,14.368
NetD103_1: D103.1 R103.2 | length 1.3
  Top Layer w0.3: R103.2 D103.1
NetD103_2: D103.2 U100.39 | length 6.5
  Top Layer w0.3: U100.39 55.948,15.9 D103.2@57.48,14.368
NetD104_1: D104.1 R104.2 | length 1.3
  Top Layer w0.3: R104.2 D104.1
NetD104_2: D104.2 U100.40 | length 7.9
  Top Layer w0.3: U100.40 56.718,16.4 D104.2@58.75,14.368
NetD106_1: D106.1 R115.2 | length 1
  Top Layer w0.4: R115.2 D106.1
NetD108_2: D108.2 R105.1 | length 23.4
  Top Layer w0.4: D108.2 33.95,37 R105.1
NetD109_2: D109.2 R106.1 | length 23.4
  Top Layer w0.4: D109.2 33.75,35.8 R106.1
NetD110_2: D110.2 R107.1 | length 24.5
  Top Layer w0.4: D110.2 17.75,35 33.15,35 R107.1
NetD111_2: D111.2 R108.1 | length 25
  Top Layer w0.4: D111.2 18.2,34.25 32.5,34.25 R108.1
NetL102_1: L102.1 U102.6 | length 7.6
  Top Layer w0.5: L102.1@19.42,9.87 L102.1
  Top Layer w0.6: U102.6 L102.1@19.42,9.87
NetL103_2: L103.2 U102.1 | length 6.2
  Top Layer w0.5: U102.1 L103.2
NetL104_3: L104.3 U103.7 | length 2.6
  Top Layer w0.5: L104.3 18.665,23.365 U103.7
NetL104_4: L104.4 U103.6 | length 2.6
  Top Layer w0.5: L104.4 18.665,24.635 U103.6
NetL105_3: L105.3 U105.7 | length 2.6
  Top Layer w0.5: L105.3 18.665,15.365 U105.7
NetL105_4: L105.4 U105.6 | length 2.6
  Top Layer w0.5: L105.4 18.665,16.635 U105.6
NetR100_2: R100.2 X100.B5 | length 2.2
  Top Layer w0.3: R100.2 64.3,21.25 X100.B5
NetR105_2: R105.2 U100.61 | length 12.9
  Top Layer w0.3: R105.2@39.123,33.372 41.097,31.398 41.097,27.103 43.7,24.5 U100.61
NetR106_2: R106.2 U100.62 | length 11.4
  Top Layer w0.3: R106.2@39.18,32.033 39.192,32.033 40.589,30.636 40.589,26.711 43.2,24.1 U100.62
NetR107_2: R107.2 U100.63 | length 9.7
  Top Layer w0.3: R107.2@39.186,30.642 40.081,29.747 40.081,26.319 42.7,23.7 U100.63
NetR108_2: R108.2 U100.64 | length 8.1
  Top Layer w0.3: R108.2@39.192,29.239 39.192,26.308 42.2,23.3 U100.64
NetR116_1: R116.1 U100.16 | length 1.6
  Top Layer w0.3: R116.1 39.25,12.25 39.9,12.9 U100.16
NetR117_1: R117.1 U100.15 | length 1.4
  Top Layer w0.3: R117.1 38.95,13.4 U100.15
NetR118_2: R118.2 X100.A5 | length 2.4
  Top Layer w0.3: R118.2 64.8,18.25 X100.A5
NetU100_17: U100.17 X101.2 | length 3
  Top Layer w0.3: X101.2@41.478,8.284 42.2,9.006 U100.17
NetU100_18: U100.18 X101.3 | length 3.2
  Top Layer w0.3: U100.18 42.7,9.602 X101.3@44.018,8.284
NetU103_1: U103.1 U104.7 | length 3.9
  Top Layer w0.4: U103.1 27.845,22.095 29.115,23.365 U104.7
NetU103_4: U103.4 U104.6 | length 3.9
  Top Layer w0.4: U103.4 27.845,25.905 29.115,24.635 U104.6
NetU105_1: U105.1 U106.7 | length 3.9
  Top Layer w0.4: U105.1 27.845,14.095 29.115,15.365 U106.7
NetU105_4: U105.4 U106.6 | length 3.9
  Top Layer w0.4: U105.4 27.845,17.905 29.115,16.635 U106.6
RESETN: R112.1 U100.52 X104.10 | length 8.8
  Top Layer w0.3: X104.10@47.542,27.705 X104.10@47.552,27.715 ; U100.52 48.2,23.388 v1(48.59,23.778)
  Top Layer w0.4: X104.10 50.15,27.6 R112.1 50.2,26.912 v1(49.352,26.064)
  Bottom Layer w0.3: v1(48.59,23.778) 49.352,24.54 v1(49.352,26.064)
SWCLK: R111.1 U100.57 X104.4 | length 12.2
  Top Layer w0.3: U100.57 45.7,30.7 X104.4@46.515,31.515
  Top Layer w0.4: X104.4 50.16,31.41 R111.1
SWDIO: U100.58 X104.2 | length 12
  Top Layer w0.3: U100.58 45.2,27.184 45.202,27.186 45.202,28.014 45.2,28.016 45.2,28.454 45.202,28.456 45.202,29.284 45.2,29.286 45.2,29.724 45.202,29.726 45.202,30.554 45.2,30.556 45.2,30.994 45.202,30.996 45.202,31.402 46.585,32.785 X104.2@47.542,32.785
USB_N: L101.2 U100.45 | length 4
  Top Layer w0.3: U100.45 55.45,18.9 L101.2
USB_P: L101.3 U100.46 | length 4.1
  Top Layer w0.3: U100.46 55.25,19.4 L101.3
VBUS: D100.5 L100.1 X100.A4-B9 X100.B4-A9 | length 15.9
  Top Layer w0.3: X100.A4-B9 66.85,17.1 67,17.25 67.25,17.25 68,18 68,21 67.237,21.763 67.225,21.763 67.088,21.9 X100.B4-A9
  Top Layer w0.4: L100.1 60.5,23 61.25,22.25 ; D100.5 60.8,21.8 61.25,22.25 ; X100.B4-A9 65.6,21.9 65.25,22.25 61.25,22.25
X_CAN_1_H: D105.2 L104.2 R109.2 X102.7 | length 13.9
  Top Layer w0.4: X102.7 9.8,20.87 10.205,20.465 D105.2 10.718,20.465 11.541,21.288 11.541,23.259 R109.2 12.618,23.894 13.192,23.32 L104.2@15.4,23.32
X_CAN_1_L: D105.1 L104.1 R110.2 X102.2 | length 10.5
  Top Layer w0.4: X102.2 7.11,22.365 D105.1 10.398,22.462 R110.2 11.204,24.7 L104.1
X_CAN_2_H: D107.1 L105.2 R113.2 X102.8 | length 15.8
  Top Layer w0.4: X102.8 8.51,18.13 9.57,19.19 D107.1 10.845,19.19 11.922,18.113 v1(11.922,17.418) ; v1(11.922,15.065) 12.176,15.319 R113.2 14.362,15.888 14.95,15.3 L105.2
  Bottom Layer w0.4: v1(11.922,15.065) v1(11.922,17.418)
X_CAN_2_L: D107.2 L105.1 R114.2 X102.1 | length 19.2
  Top Layer w0.4: v1(9.636,17.986) 9.799,17.986 D107.2 10.017,16.812 10.017,16.269 R114.2 10.586,15.888 11.414,16.716 L105.1@15.4,16.716
  Bottom Layer w0.4: X102.1 6.985,24.735 5.75,23.5 5.75,18.75 6.514,17.986 v1(9.636,17.986)
pads on no net: D100.1 MTG100.1 MTG101.1 PM100.1 PM101.1 U100.1 U100.2 U100.4 U100.5 U100.6 U100.9 U100.10 U100.11 U100.12 U100.13 U100.14 U100.19 U100.20 U100.23 U100.24 U100.25 U100.26 U100.29 U100.30 U100.32 U100.35 U100.36 U100.41 U100.42 U100.49 U100.50 U100.51 U100.55 U100.59 U100.60 U101.4 X100.1 X100.A8 X100.B8 X102.4 X102.5 X102.9 X102.SH X104.6 X104.7 X104.8

## Polygon pours and split planes (outlines as drawn)
GND on Bottom Layer "GND_L02_P006" (solid, remove dead copper, pour order 6): 35,39 73,39 73,0 35,0
GND2 on Bottom Layer "GND2_L02_P007" (solid, remove dead copper, pour order 7): 29.5,26.646 27.472,28.25 4.5,28.25 4.5,3.74 25.518,3.768 29.5,7.75

## Keep-outs
Keep-Out Layer:
  circle w0.254: c5.715,32 r3.5
  circle w0.254: c5.715,7 r4

## Other copper
Top Layer:
  text "D5035-01-20" at 55.75,37.5 h1.52 r180
  text "0" at 12.3,35.8 h1.4
  text ">" at 41.25,32.5 h0.8
  text "1" at 12.5,31.8 h1.4
  text "0" at 16.55,20.8 h1.4
  text "1" at 16.8,12.8 h1.4

## Silkscreen, mask and mechanical layers (free items; w line width, h text height)
Top Solder:
  rectangle: 31.667,9.348 34.334,28.652
  text "0" at 12.3,35.8 h1.4
  text ">" at 41.25,32.5 h0.8
  text "1" at 12.5,31.8 h1.4
  text "0" at 16.55,20.8 h1.4
  text "1" at 16.8,12.8 h1.4
Bottom Solder:
  rectangle: 31.667,9.348 34.334,28.652
M1_Dimension:
  the board outline again, w0.254

## Dimensions
0,37 to 73,33 on M2_Measures
2,39 to 3,0 on M2_Measures